# Altium PCB IO_robot.PcbDoc
Units mil, origin at the board's own origin, x right, y up, seen from the top; angles counter-clockwise.
Board outline 3753 x 3294 mil, 2 copper layers (Top Layer, Bottom Layer); 162 components, 163 nets, 498 pads, 0 vias.
Unrouted connection lines stored in the file: 261.
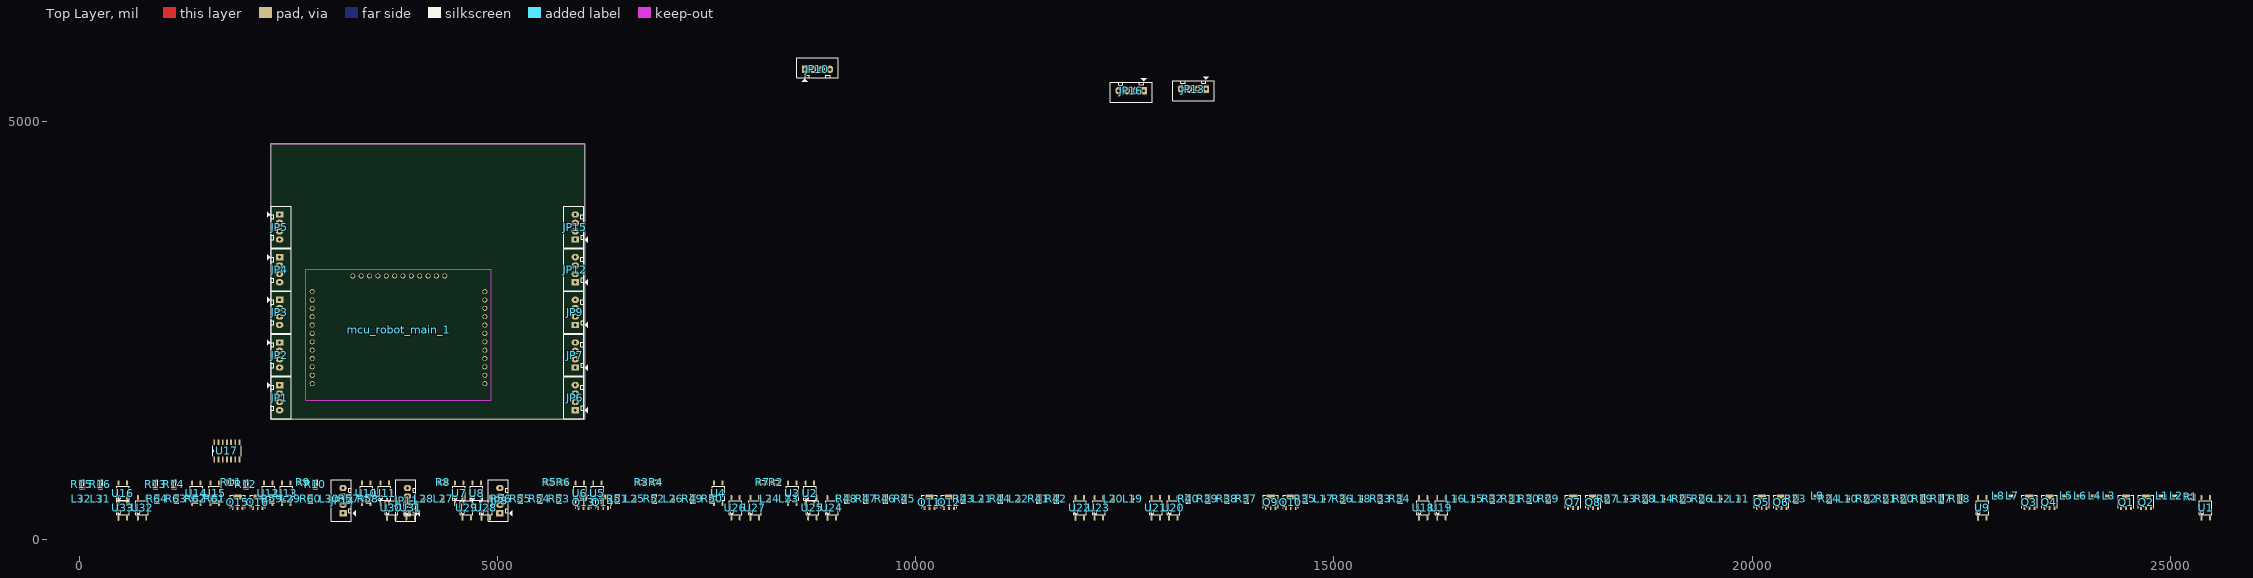
[diagram p0: Top Layer view]
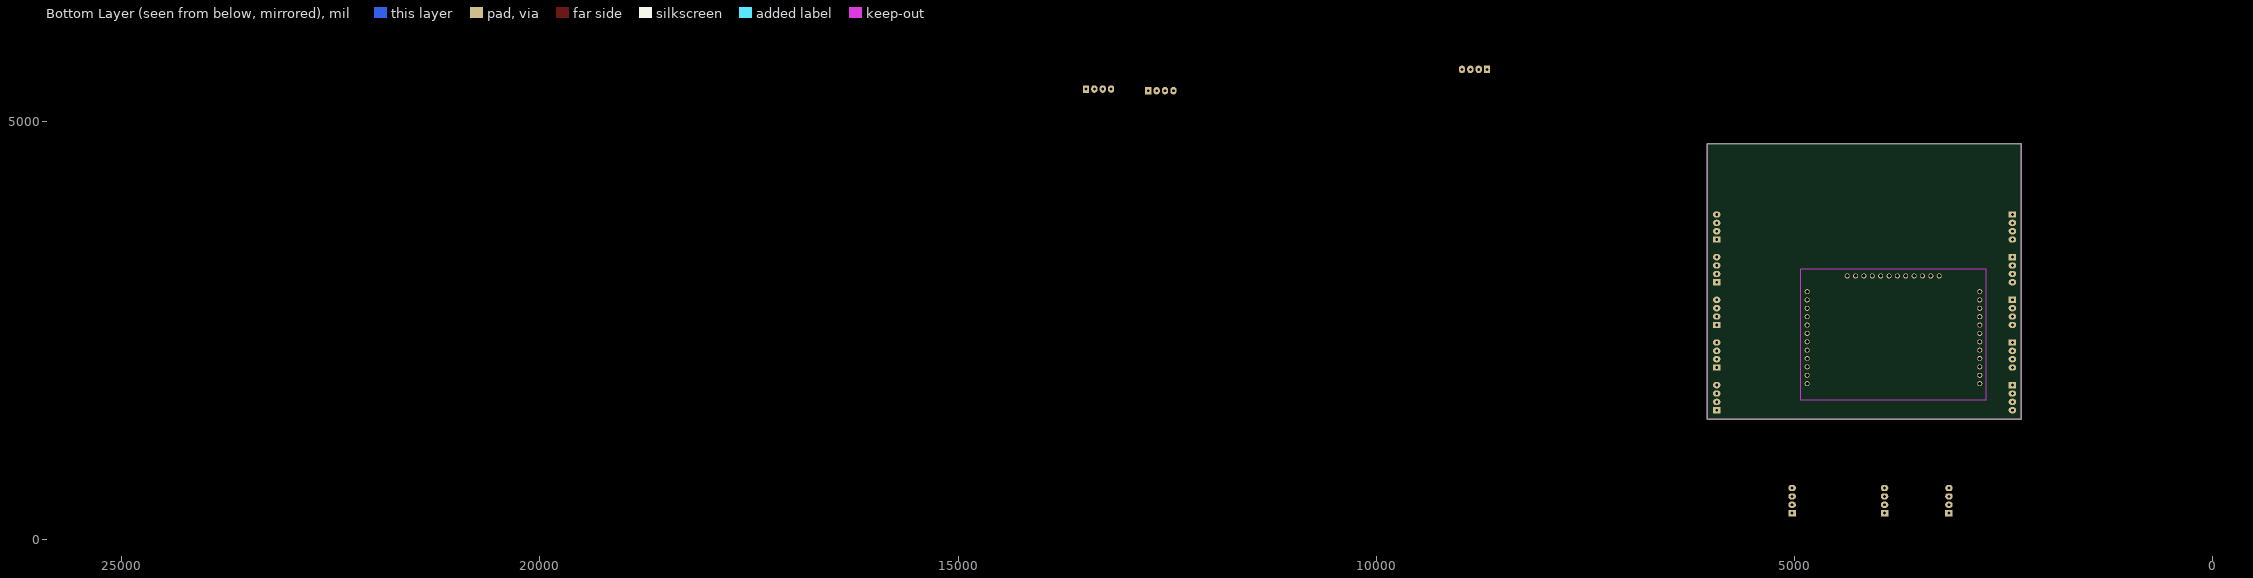
[diagram p1: Bottom Layer view, seen from below]

## Layer stack, top to bottom
Top Solder: solder mask 0.4, Solder Resist, Dk 3.5
Top Layer: signal copper 1.4
Dielectric 1: dielectric 12.6, FR-4, Dk 4.8
Bottom Layer: signal copper 1.4
Bottom Solder: solder mask 0.4, Solder Resist, Dk 3.5

## Board outline
6040,1435 2287,1435 2287,4729 6040,4729

## Design rules (kind name [scope] priority, off if disabled: settings)
Clearance [All] p1: gap=10 ignorepadtopadclearanceinfootprint=FALSE except(0: Arc-Hole Track-Hole SMDPad-Hole THPad-Hole Via-Hole Fill-Hole Poly-Hole Region-Hole Text-Hole)
PolygonConnect [All] p1: connectstyle=Relief reliefconductorwidth=10 reliefentries=4 polygonreliefangle="90 Angle" airgapwidth=10
RoutingVias [All] p1: holewidth=28 width=50 viastyle="Through Hole" minholewidth=28 minwidth=50 maxholewidth=28 maxwidth=50
SolderMaskExpansion [All] p1: expansion=4 istentingtop=FALSE
Width [All] p1: maxlimit=10 minlimit=10 preferedwidth=10
30 further rules are at their usual default settings.

## Classes and differential pairs
component class IO_robot: JP1 JP2 JP4 JP5 JP6 JP10 JP11 JP12 JP13 JP14 JP16 L1 L2 L3 L4 L5 L6 L7 L8 L9 L10 L11 L12 L13 L14 L15 L16 L17 L18 L19 L20 L21 L22 L23 L24 L25 L26 L27 L28 L29 L30 L31 L32 mcu_robot_main_1 Q1 Q2 Q3 Q4 Q5 Q6 Q7 Q8 Q9 Q10 Q11 Q12 Q13 Q14 Q15 Q16 R2 R3 R4 R5 R6 R8 R9 R10 R11 R12 R13 R14 R15 R16 R17 R18 R19 R20 R21 R22 R23 R24 R25 R26 R27 R28 R29 R30 R31 R32 R33 R34 R35 R36 R37 R38 R39 R40 R41 R42 R43 R44 R45 R46 R47 R48 R49 R50 R51 R52 R53 R54 R55 R56 R57 R58 R59 R60 R61 R62 R63 R64 U2 U4 U5 U6 U7 U8 U10 U11 U12 U13 U14 U15 U16 U18 U19 U20 U21 U22 U23 U24 U25 U26 U27 U28 U29 U30 U31 U32 U33

## Components (designator, comment, footprint, x,y, rotation, side; value= is the part's Value field where it differs from the comment)
JP1 "JP4" CON4 2395,1845 r270 top value="Connector 4"
JP2 "JP4" CON4 2395,2355 r270 top value="Connector 4"
JP3 "JP4" CON4 2395,2865 r270 top value="Connector 4"
JP4 "JP4" CON4 2395,3375 r270 top value="Connector 4"
JP5 "JP4" CON4 2395,3885 r270 top value="Connector 4"
JP6 "JP4" CON4 5930,1545 r90 top value="Connector 4"
JP7 "JP4" CON4 5930,2055 r90 top value="Connector 4"
JP8 "JP4" CON4 5028.62,315 r90 top value="Connector 4"
JP9 "JP4" CON4 5930,2565 r90 top value="Connector 4"
JP10 "JP4" CON4 8675,5620 r0 top value="Connector 4"
JP11 "JP4" CON4 3923.62,315 r90 top value="Connector 4"
JP12 "JP4" CON4 5930,3075 r90 top value="Connector 4"
JP13 "JP4" CON4 13470,5385 r180 top value="Connector 4"
JP14 "JP4" CON4 3153.62,315 r90 top value="Connector 4"
JP15 "JP4" CON4 5930,3585 r90 top value="Connector 4"
JP16 "JP4" CON4 12725,5365 r180 top value="Connector 4"
L1 "LED" LED_GREEN_SMD_0603 24903.62,520 r0 top
L2 "LED" LED_GREEN_SMD_0603 25068.62,520 r0 top
L3 "LED" LED_RED_SMD_0603 24263.62,520 r0 top
L4 "LED" LED_RED_SMD_0603 24093.62,520 r0 top
L5 "LED" LED_GREEN_SMD_0603 23753.62,520 r0 top
L6 "LED" LED_GREEN_SMD_0603 23923.62,520 r0 top
L7 "LED" LED_RED_SMD_0603 23108.62,520 r0 top
L8 "LED" LED_RED_SMD_0603 22938.62,520 r0 top
L9 "LED" LED_GREEN_SMD_0603 20778.62,520 r0 top
L10 "LED" LED_GREEN_SMD_0603 21148.62,485 r90 top
L11 "LED" LED_RED_SMD_0603 19843.62,485 r90 top
L12 "LED" LED_RED_SMD_0603 19623.62,485 r90 top
L13 "LED" LED_GREEN_SMD_0603 18493.62,485 r90 top
L14 "LED" LED_GREEN_SMD_0603 18943.62,485 r90 top
L15 "LED" LED_RED_SMD_0603 16668.62,485 r90 top
L16 "LED" LED_RED_SMD_0603 16448.62,485 r90 top
L17 "LED" LED_GREEN_SMD_0603 14878.62,485 r90 top
L18 "LED" LED_GREEN_SMD_0603 15328.62,485 r90 top
L19 "LED" LED_RED_SMD_0603 12593.62,485 r90 top
L20 "LED" LED_RED_SMD_0603 12363.62,485 r90 top
L21 "LED" LED_GREEN_SMD_0603 10793.62,485 r90 top
L22 "LED" LED_GREEN_SMD_0603 11233.62,485 r90 top
L23 "LED" LED_RED_SMD_0603 8483.62,485 r90 top
L24 "LED" LED_RED_SMD_0603 8253.62,485 r90 top
L25 "LED" LED_GREEN_SMD_0603 6643.62,485 r90 top
L26 "LED" LED_GREEN_SMD_0603 7103.62,485 r90 top
L27 "LED" LED_RED_SMD_0603 4348.62,485 r90 top
L28 "LED" LED_RED_SMD_0603 4118.62,485 r90 top
L29 "LED" LED_GREEN_SMD_0603 2528.62,485 r90 top
L30 "LED" LED_GREEN_SMD_0603 2988.62,485 r90 top
L31 "LED" LED_RED_SMD_0603 253.62,485 r90 top
L32 "LED" LED_RED_SMD_0603 23.62,485 r90 top
mcu_robot_main_1 "robot_main_001" ROBOT_MAIN_001 2124,1532 r0 top
Q1 "D882" SOT89 24473.62,455 r0 top
Q2 "D882" SOT89 24713.62,455 r0 top
Q3 "D882" SOT89 23318.62,455 r0 top
Q4 "D882" SOT89 23558.62,455 r0 top
Q5 "D882" SOT89 20118.62,455 r0 top
Q6 "D882" SOT89 20353.62,455 r0 top
Q7 "D882" SOT89 17863.62,455 r0 top
Q8 "D882" SOT89 18103.62,455 r0 top
Q9 "D882" SOT89 14248.62,455 r0 top
Q10 "D882" SOT89 14488.62,455 r0 top
Q11 "D882" SOT89 10168.62,455 r0 top
Q12 "D882" SOT89 10403.62,455 r0 top
Q13 "D882" SOT89 6033.62,455 r0 top
Q14 "D882" SOT89 6268.62,455 r0 top
Q15 "D882" SOT89 1898.62,455 r0 top
Q16 "D882" SOT89 2138.62,455 r0 top
R1 "1k" RES_SMD0603 25238.62,510 r0 top
R2 "1k" RES_SMD0603 8333.62,685 r0 top
R3 "4k7" RES_SMD0603 6723.62,685 r0 top
R4 "4k7" RES_SMD0603 6893.62,685 r0 top
R5 "1k" RES_SMD0603 5623.62,685 r0 top
R6 "1k" RES_SMD0603 5793.62,685 r0 top
R7 "4k7" RES_SMD0603 8168.62,685 r0 top
R8 "4k7" RES_SMD0603 4348.62,685 r0 top
R9 "1k" RES_SMD0603 2673.62,685 r0 top
R10 "1k" RES_SMD0603 2823.62,660 r90 top
R11 "4k7" RES_SMD0603 1818.62,685 r0 top
R12 "4k7" RES_SMD0603 1993.62,660 r90 top
R13 "1k" RES_SMD0603 913.62,660 r90 top
R14 "1k" RES_SMD0603 1133.62,660 r90 top
R15 "4k7" RES_SMD0603 33.62,660 r90 top
R16 "4k7" RES_SMD0603 253.62,660 r90 top
R17 "1k" RES_SMD0603 22263.62,485 r90 top
R18 "1k" RES_SMD0603 22483.62,485 r90 top
R19 "1k" RES_SMD0603 22043.62,485 r90 top
R20 "1k" RES_SMD0603 21813.62,485 r90 top
R21 "4k7" RES_SMD0603 21603.62,485 r90 top
R22 "4k7" RES_SMD0603 21373.62,485 r90 top
R23 "4K7" RES_SMD0603 20523.62,485 r90 top
R24 "4K7" RES_SMD0603 20923.62,485 r90 top
R25 "1k" RES_SMD0603 19173.62,485 r90 top
R26 "1k" RES_SMD0603 19403.62,485 r90 top
R27 "4K7" RES_SMD0603 18273.62,485 r90 top
R28 "4K7" RES_SMD0603 18723.62,485 r90 top
R29 "1k" RES_SMD0603 17568.62,485 r90 top
R30 "1k" RES_SMD0603 17338.62,485 r90 top
R31 "4k7" RES_SMD0603 17128.62,485 r90 top
R32 "4k7" RES_SMD0603 16898.62,485 r90 top
R33 "1k" RES_SMD0603 15558.62,485 r90 top
R34 "1k" RES_SMD0603 15788.62,485 r90 top
R35 "4K7" RES_SMD0603 14658.62,485 r90 top
R36 "4K7" RES_SMD0603 15108.62,485 r90 top
R37 "1k" RES_SMD0603 13953.62,485 r90 top
R38 "1k" RES_SMD0603 13723.62,485 r90 top
R39 "4k7" RES_SMD0603 13493.62,485 r90 top
R40 "4k7" RES_SMD0603 13263.62,485 r90 top
R41 "1k" RES_SMD0603 11473.62,485 r90 top
R42 "1k" RES_SMD0603 11683.62,485 r90 top
R43 "4K7" RES_SMD0603 10573.62,485 r90 top
R44 "4K7" RES_SMD0603 11013.62,485 r90 top
R45 "1k" RES_SMD0603 9868.62,485 r90 top
R46 "1k" RES_SMD0603 9638.62,485 r90 top
R47 "4k7" RES_SMD0603 9408.62,485 r90 top
R48 "4k7" RES_SMD0603 9178.62,485 r90 top
R49 "1k" RES_SMD0603 7338.62,485 r90 top
R50 "1k" RES_SMD0603 7568.62,485 r90 top
R51 "4K7" RES_SMD0603 6438.62,485 r90 top
R52 "4K7" RES_SMD0603 6878.62,485 r90 top
R53 "1k" RES_SMD0603 5738.62,485 r90 top
R54 "1k" RES_SMD0603 5508.62,485 r90 top
R55 "4k7" RES_SMD0603 5278.62,485 r90 top
R56 "4k7" RES_SMD0603 5048.62,485 r90 top
R57 "1k" RES_SMD0603 3228.62,485 r90 top
R58 "1k" RES_SMD0603 3458.62,485 r90 top
R59 "4K7" RES_SMD0603 2308.62,485 r90 top
R60 "4K7" RES_SMD0603 2768.62,485 r90 top
R61 "1k" RES_SMD0603 1623.62,485 r90 top
R62 "1k" RES_SMD0603 1393.62,485 r90 top
R63 "4k7" RES_SMD0603 1163.62,485 r90 top
R64 "4k7" RES_SMD0603 933.62,485 r90 top
U1 "OPTO" SOP4 25418.62,380 r90 top
U2 "OPTO" SOP4 8733.62,555 r90 top
U3 "OPTO" SOP4 8523.62,555 r90 top
U4 "OPTO" SOP4 7638.62,555 r90 top
U5 "OPTO" SOP4 6193.62,555 r90 top
U6 "OPTO" SOP4 5983.62,555 r90 top
U7 "OPTO" SOP4 4538.62,555 r90 top
U8 "OPTO" SOP4 4748.62,555 r90 top
U9 "OPTO" SOP4 22748.62,380 r90 top
U10 "OPTO" SOP4 3428.62,555 r90 top
U11 "OPTO" SOP4 3648.62,555 r90 top
U12 "OPTO" SOP4 2258.62,555 r90 top
U13 "OPTO" SOP4 2473.62,555 r90 top
U14 "OPTO" SOP4 1398.62,555 r90 top
U15 "OPTO" SOP4 1618.62,555 r90 top
U16 "OPTO" SOP4 518.62,555 r90 top
U17 "74HC32D-T" SOIC127P600X175-14N 1765,1058 r90 top
U18 "OPTO" SOP4 16063.62,380 r90 top
U19 "OPTO" SOP4 16283.62,380 r90 top
U20 "OPTO" SOP4 13078.62,380 r90 top
U21 "OPTO" SOP4 12868.62,380 r90 top
U22 "OPTO" SOP4 11958.62,380 r90 top
U23 "OPTO" SOP4 12188.62,380 r90 top
U24 "OPTO" SOP4 8993.62,380 r90 top
U25 "OPTO" SOP4 8763.62,380 r90 top
U26 "OPTO" SOP4 7843.62,380 r90 top
U27 "OPTO" SOP4 8073.62,380 r90 top
U28 "OPTO" SOP4 4858.62,380 r90 top
U29 "OPTO" SOP4 4628.62,380 r90 top
U30 "OPTO" SOP4 3728.62,380 r90 top
U31 "OPTO" SOP4 3958.62,380 r90 top
U32 "OPTO" SOP4 748.62,380 r90 top
U33 "OPTO" SOP4 518.62,380 r90 top

## Footprints (in the part's own frame and the unit in brackets; to place one, negate y for a bottom-side part, rotate by r counter-clockwise, add the part's x,y. Pads: shape width x height; smd on the part's side, far side on the other; paste and mask are expansions set on the pad)
CON4 [mil]
  rect 75x90 hole 34: 1(0,0)
  oval 75x90 hole 34: 2(100,0) 3(200,0) 4(300,0)
  silkscreen extent -100,-150 400,140, body extent -90,-90 398,136, height 276
LED_GREEN_SMD_0603 [mm]
  rect 0.8x0.8 smd: 1(-0.8,0) 2(0.8,0)
  silkscreen extent -0.2,-0.4 0.2,0.4, body extent -0.85,-0.45 0.85,0.45, height 0.88
LED_RED_SMD_0603 [mm]
  rect 0.8x0.8 smd: 1(-0.8,0) 2(0.8,0)
  silkscreen extent -0.2,-0.4 0.2,0.4, body extent -0.85,-0.45 0.85,0.45, height 0.88
RES_SMD0603 [mm]
  rect 0.771x1.1 smd: 1(-0.822,0.051) 2(0.879,0.051)
  silkscreen extent -1.35,-0.64 1.4,0.74, body extent -0.8,-0.37 0.84,0.48, height 0.46
ROBOT_MAIN_001 [mil] "robot_main_001"
  round 60 hole 42: 1(2246,1618) 2(2146,1618) 3(2046,1618) 4(1946,1618) 5(1846,1618) 6(1746,1618) 7(1646,1618) 8(1546,1618) 9(1446,1618) 10(1346,1618) 11(1246,1618) 12(1146,1618) 13(661,1431) 14(661,1331) 15(661,1231) 16(661,1131) 17(661,1031) 18(661,931) 19(661,831) 20(661,731) 21(661,631) 22(661,531) 23(661,431) 24(661,331) 25(2725,331) 26(2725,431) 27(2725,531) 28(2725,631) 29(2725,731) 30(2725,831) 31(2725,931) 32(2725,1031) 33(2725,1131) 34(2725,1231) 35(2725,1331) 36(2725,1431)
  Bottom Layer lines w8: 661,621 661,631 ; 661,931 664,931 ; 1236.05,1608.05 1246,1618 ; 1336.3,1608.3 1346,1618 ; 1744.63,1618 1746,1618 ; 2146,1618 2155.2,1608.8 ; 2719.34,525.34 2725,531 ; 2724,1032 2725,1031
  Bottom Layer lines w15: 1146,1614 1146,1618
  Keep-Out Layer lines w5: 586,131 2801,131 2801,1699 586,1699 586,131
SOIC127P600X175-14N [mil]
  rect 67x21 smd: 1(-102,150) 2(-102,100) 3(-102,50) 4(-102,0) 5(-102,-50) 6(-102,-100) 7(-102,-150) 8(102,-150) 9(102,-100) 10(102,-50) 11(102,0) 12(102,50) 13(102,100) 14(102,150)
  silkscreen extent -63,-172 63,172, body extent -117,-171 119,169, height 54
SOP4 [mil] "SOIC, 8-Leads, Body 4.90x3.90mm, Pitch 1.27mm, IPC Medium Density"
  oval 60.24x23.62 smd: 1(-126.3,49) 2(-125.3,-52) 3(122.7,-52) 4(121.7,49)
  silkscreen extent -84,-77 82,72, body extent -139,-78 137,74, height 87
SOT89 [mil]
  rect 22.46x47.24 smd: 1(-64,-77) 2(-5,-78) 3(54,-77)
  rect 100x57.24 smd: 2(-5,54.21)
  silkscreen extent -96,-83 86,75, body extent -94,-83 84,72, height 56

## Part data
JP1 JP2 JP3 JP4 JP5 JP6 JP7 JP8 JP9 JP10 JP11 JP12 JP13 JP14 JP15 JP16: library part Con4, "Connector 4"
L1 L2 L3 L4 L5 L6 L7 L8 L9 L10 L11 L12 L13 L14 L15 L16 L17 L18 L19 L20 L21 L22 L23 L24 L25 L26 L27 L28 L29 L30 L31 L32: "Lighting Eminter Diode"
mcu_robot_main_1: "stm32f4_mpu9250"
Q1 Q2 Q3 Q4 Q5 Q6 Q7 Q8 Q9 Q10 Q11 Q12 Q13 Q14 Q15 Q16: library part "Tranzitor NPN"
R1 R2 R3 R4 R5 R6 R7 R8 R9 R10 R11 R12 R13 R14 R15 R16 R17 R18 R19 R20 R21 R22 R23 R24 R25 R26 R27 R28 R29 R30 R31 R32 R33 R34 R35 R36 R37 R38 R39 R40 R41 R42 R43 R44 R45 R46 R47 R48 R49 R50 R51 R52 R53 R54 R55 R56 R57 R58 R59 R60 R61 R62 R63 R64: library part Resistor
U17: "OR Gate IC 4 Channel 14-SO", Package="SOIC-14 NXP Semiconductors", Availability=Unavailable, MF="Nexperia USA", MP=74HC32D-T, Price=None, SnapEDA_Link=https://www.snapeda.com/parts/74HC32D-T/Nexperia%20USA%20Inc./view-part/398122/?ref=snap

## Nets (pads, with @x,y where several pads share a name; then routed paths per layer and width w, separated by ;. In a path a pad name is that pad's centre, name@x,y a point inside that pad or via, vN(x,y) a via of type N, cw(c..) or ccw(c..) an arc to the next point about the centre after c; other vN are vias at no path point)
3.3V: R5.1 R6.1 R13.1 R14.1 R19.1 R20.1 R29.1 R30.1 R37.1 R38.1 R45.1 R46.1 R53.1 R54.1 R61.1 R62.1
+24VDC_00: JP1.4 JP3.4 JP6.4 JP9.4 R7.1 R8.1 R15.1 R16.1 R21.1 R22.1 R31.1 R32.1 R39.1 R40.1 R47.1 R48.1 R55.1 R56.1 R63.1 R64.1 U1.4 U2.4 U5.4 U6.4 U9.4 U10.4 U13.4 U14.4 U18.4 U19.4 U22.4 U23.4 U26.4 U27.4 U30.4 U31.4
dig_in_01: JP1.3 U3.2
dig_in_02: JP1.2 U7.2
dig_in_03: JP1.1 U11.2
dig_in_04: JP2.4 U15.2
dig_in_05: JP2.3 U20.2
dig_in_06: JP2.2 U24.2
dig_in_07: JP2.1 U28.2
dig_in_08: JP3.3 U32.2
dig_in_09: JP3.2 U4.2
dig_in_10: JP3.1 U8.2
dig_in_11: JP4.4 U12.2
dig_in_12: JP4.3 U16.2
dig_in_13: JP4.2 U21.2
dig_in_14: JP5.4 U25.2
dig_in_15: JP5.3 U29.2
dig_in_16: JP5.2 U33.2
dig_out_01: JP6.3 Q1.2
dig_out_02: JP6.2 Q3.2
dig_out_03: JP6.1 Q5.2
dig_out_04: JP7.4 Q7.2
dig_out_05: JP7.3 Q9.2
dig_out_06: JP7.2 Q11.2
dig_out_07: JP7.1 Q13.2
dig_out_08: JP9.3 Q15.2
dig_out_09: JP9.2 Q2.2
dig_out_10: JP9.1 Q4.2
dig_out_11: JP12.4 Q6.2
dig_out_12: JP12.3 Q8.2
dig_out_13: JP12.2 Q10.2
dig_out_14: JP15.4 Q12.2
dig_out_15: JP15.3 Q14.2
dig_out_16: JP15.2 Q16.2
Din_01: R5.2 U3.4
Din_02: R13.2 U7.4
Din_03: R19.2 U11.4
Din_04: R29.2 U15.4
Din_05: R37.2 U20.4
Din_06: R45.2 U24.4
Din_07: R53.2 U28.4
Din_08: R61.2 U32.4
Din_09: R6.2 U4.4
Din_10: R14.2 U8.4
Din_11: R20.2 U12.4
Din_12: R30.2 U16.4
Din_13: R38.2 U21.4
Din_14: R46.2 U25.4
Din_15: R54.2 U29.4
Din_16: R62.2 U33.4
Dout_01: R1.2
Dout_02: R9.2
Dout_03: R17.2
Dout_04: R25.2
Dout_05: R33.2
Dout_06: R41.2
Dout_07: R49.2
Dout_08: R57.2
Dout_09: R2.2
Dout_10: R10.2
Dout_11: R18.2
Dout_12: R26.2
Dout_13: R34.2
Dout_14: R42.2
Dout_15: R50.2
Dout_16: R58.2
GND: JP4.1 JP5.1 JP12.1 JP15.1 L3.2 L4.2 L7.2 L8.2 L11.2 L12.2 L15.2 L16.2 L19.2 L20.2 L23.2 L24.2 L27.2 L28.2 L31.2 L32.2 Q1.3 Q2.3 Q3.3 Q4.3 Q5.3 Q6.3 Q7.3 Q8.3 Q9.3 Q10.3 Q11.3 Q12.3 Q13.3 Q14.3 Q15.3 Q16.3 U1.2 U2.2 U5.2 U6.2 U9.2 U10.2 U13.2 U14.2 U18.2 U19.2 U22.2 U23.2 U26.2 U27.2 U30.2 U31.2
NetL1_1: L1.1 R3.1
NetL1_2: L1.2 Q1.1
NetL2_1: L2.1 R4.1
NetL2_2: L2.2 Q2.1
NetL3_1: L3.1 U3.3
NetL4_1: L4.1 U4.3
NetL5_1: L5.1 R11.1
NetL5_2: L5.2 Q3.1
NetL6_1: L6.1 R12.1
NetL6_2: L6.2 Q4.1
NetL7_1: L7.1 U7.3
NetL8_1: L8.1 U8.3
NetL9_1: L9.1 R23.1
NetL9_2: L9.2 Q5.1
NetL10_1: L10.1 R24.1
NetL10_2: L10.2 Q6.1
NetL11_1: L11.1 U11.3
NetL12_1: L12.1 U12.3
NetL13_1: L13.1 R27.1
NetL13_2: L13.2 Q7.1
NetL14_1: L14.1 R28.1
NetL14_2: L14.2 Q8.1
NetL15_1: L15.1 U15.3
NetL16_1: L16.1 U16.3
NetL17_1: L17.1 R35.1
NetL17_2: L17.2 Q9.1
NetL18_1: L18.1 R36.1
NetL18_2: L18.2 Q10.1
NetL19_1: L19.1 U20.3
NetL20_1: L20.1 U21.3
NetL21_1: L21.1 R43.1
NetL21_2: L21.2 Q11.1
NetL22_1: L22.1 R44.1
NetL22_2: L22.2 Q12.1
NetL23_1: L23.1 U24.3
NetL24_1: L24.1 U25.3
NetL25_1: L25.1 R51.1
NetL25_2: L25.2 Q13.1
NetL26_1: L26.1 R52.1
NetL26_2: L26.2 Q14.1
NetL27_1: L27.1 U28.3
NetL28_1: L28.1 U29.3
NetL29_1: L29.1 R59.1
NetL29_2: L29.2 Q15.1
NetL30_1: L30.1 R60.1
NetL30_2: L30.2 Q16.1
NetL31_1: L31.1 U32.3
NetL32_1: L32.1 U33.3
NetR1_1: R1.1 U1.1
NetR2_1: R2.1 U2.1
NetR3_2: R3.2 U1.3
NetR4_2: R4.2 U2.3
NetR7_2: R7.2 U3.1
NetR8_2: R8.2 U4.1
NetR9_1: R9.1 U5.1
NetR10_1: R10.1 U6.1
NetR11_2: R11.2 U5.3
NetR12_2: R12.2 U6.3
NetR15_2: R15.2 U7.1
NetR16_2: R16.2 U8.1
NetR17_1: R17.1 U9.1
NetR18_1: R18.1 U10.1
NetR21_2: R21.2 U11.1
NetR22_2: R22.2 U12.1
NetR23_2: R23.2 U9.3
NetR24_2: R24.2 U10.3
NetR25_1: R25.1 U13.1
NetR26_1: R26.1 U14.1
NetR27_2: R27.2 U13.3
NetR28_2: R28.2 U14.3
NetR31_2: R31.2 U15.1
NetR32_2: R32.2 U16.1
NetR33_1: R33.1 U18.1
NetR34_1: R34.1 U19.1
NetR35_2: R35.2 U18.3
NetR36_2: R36.2 U19.3
NetR39_2: R39.2 U20.1
NetR40_2: R40.2 U21.1
NetR41_1: R41.1 U22.1
NetR42_1: R42.1 U23.1
NetR43_2: R43.2 U22.3
NetR44_2: R44.2 U23.3
NetR47_2: R47.2 U24.1
NetR48_2: R48.2 U25.1
NetR49_1: R49.1 U26.1
NetR50_1: R50.1 U27.1
NetR51_2: R51.2 U26.3
NetR52_2: R52.2 U27.3
NetR55_2: R55.2 U28.1
NetR56_2: R56.2 U29.1
NetR57_1: R57.1 U30.1
NetR58_1: R58.1 U31.1
NetR59_2: R59.2 U30.3
NetR60_2: R60.2 U31.3
NetR63_2: R63.2 U32.1
NetR64_2: R64.2 U33.1
pads on no net: JP8.1 JP8.2 JP8.3 JP8.4 JP10.1 JP10.2 JP10.3 JP10.4 JP11.1 JP11.2 JP11.3 JP11.4 JP13.1 JP13.2 JP13.3 JP13.4 JP14.1 JP14.2 JP14.3 JP14.4 JP16.1 JP16.2 JP16.3 JP16.4 mcu_robot_main_1.1 mcu_robot_main_1.2 mcu_robot_main_1.3 mcu_robot_main_1.4 mcu_robot_main_1.5 mcu_robot_main_1.6 mcu_robot_main_1.7 mcu_robot_main_1.8 mcu_robot_main_1.9 mcu_robot_main_1.10 mcu_robot_main_1.11 mcu_robot_main_1.12 mcu_robot_main_1.13 mcu_robot_main_1.14 mcu_robot_main_1.15 mcu_robot_main_1.16 mcu_robot_main_1.17 mcu_robot_main_1.18 mcu_robot_main_1.19 mcu_robot_main_1.20 mcu_robot_main_1.21 mcu_robot_main_1.22 mcu_robot_main_1.23 mcu_robot_main_1.24 mcu_robot_main_1.25 mcu_robot_main_1.26 mcu_robot_main_1.27 mcu_robot_main_1.28 mcu_robot_main_1.29 mcu_robot_main_1.30 mcu_robot_main_1.31 mcu_robot_main_1.32 mcu_robot_main_1.33 mcu_robot_main_1.34 mcu_robot_main_1.35 mcu_robot_main_1.36 U17.1 U17.2 U17.3 U17.4 U17.5 U17.6 U17.7 U17.8 U17.9 U17.10 U17.11 U17.12 U17.13 U17.14

## Keep-outs
Keep-Out Layer:
  the board outline again, w10